# EAGLE board design (EAGLE 9.7.0)

Size 241.49 x 196.17 mm. Coordinates in mm from the lower left corner, seen from the top.
Outline: 0,0 241.49,0 241.49,196.17 0,196.17 0,0
Copper layers (1*16): Top 0.035mm / dielectric 1.5mm / Bottom 0.035mm
Design rules "default": minimum track width 6mil, minimum drill 0.35mm, track to track 6mil, track to pad 6mil, pad to pad 6mil, via to via 6mil, smd to smd 6mil, copper to edge 40mil, drill to drill 6mil, minimum pad ring 10mil, minimum via ring 8mil, stop-mask expansion 4mil, vias tented up to drill 0mil, thermal gap 10mil

## Footprints (pad centres in the part's own frame; a part is rotated, then mirrored left to right if it is on the bottom)
LEDRD254W60D565H860B = drill 0.981 pad 1.581: 1 -1.27,0; 2 1.27,0
LEDRD254W60D565H860B_Y = drill 0.981 pad 1.581: 1 -1.27,0; 2 1.27,0
MQ-XX-SOCKET = drill 1.27: 1 -6.223,6.223; 2 -8.788,0; 3 -6.223,-6.223; 4 6.223,-6.223; 5 8.788,0; 6 6.223,6.223
MOTOR = drill 1.118 pad 3.15 octagon: + 2.54,0; - -2.54,0
PIEZO = drill 1 pad 1.6: 1 -3.5,0; 2 3.5,0
28015 = drill 1.016 long: 1 -2.54,0; 2 0,0; 3 2.54,0
RESAD1016W63L850D250B = drill 0.83 pad 1.43: 1 -5.08,0; 2 5.08,0
GL5528 = drill 0.8 pad 1.4: 1 -1.702,0; 2 1.702,0
HA-06-SM065 = drill 1 pad 1.676: 1 -2.54,-2.54; 2 0,2.54; 3 2.54,-2.54
ARDUINO-UNO-R3-SHIELD = drill 1.016 pad 1.88: 3.3V 24.13,-2.54; 5V 24.13,0; A0 24.13,12.7; A1 24.13,15.24; A2 24.13,17.78; A3 24.13,20.32; A4 24.13,22.86; A5 24.13,25.4; AREF -24.13,-13.97; D2 -24.13,20.32; D3 -24.13,17.78; D4 -24.13,15.24; D5 -24.13,12.7; D6 -24.13,10.16; D7 -24.13,7.62; D8 -24.13,3.81; D9 -24.13,1.27; D10 -24.13,-1.27; D11 -24.13,-3.81; D12 -24.13,-6.35; D13 -24.13,-8.89; GND@0 24.13,2.54; GND@1 24.13,5.08; GND@2 -24.13,-11.43; IOREF 24.13,-7.62; NC 24.13,-10.16; RES 24.13,-5.08; RX -24.13,25.4; SCL -24.13,-19.05; SDA -24.13,-16.51; TX -24.13,22.86; VIN 24.13,7.62
JHD-162A = drill 1.016 long: 1 -19.05,0; 2 -16.51,0; 3 -13.97,0; 4 -11.43,0; 5 -8.89,0; 6 -6.35,0; 7 -3.81,0; 8 -1.27,0; 9 1.27,0; 10 3.81,0; 11 6.35,0; 12 8.89,0; 13 11.43,0; 14 13.97,0; 15 16.51,0; 16 19.05,0
TO92 = drill 0.813 octagon: 1 -1.27,0; 2 0,1.905; 3 1.27,0

## Placement (x,y rotation side)
D1  RED  [LEDRD254W60D565H860B]  7.91,139.59 270 top
D2  RED  [LEDRD254W60D565H860B]  7.91,132.55 270 top
D3  RED  [LEDRD254W60D565H860B]  7.91,38.54 270 top
D4  RED  [LEDRD254W60D565H860B]  7.91,31.5 270 top
D5  YELLOW  [LEDRD254W60D565H860B_Y]  233.58,138.57 90 top
D6  YELLOW  [LEDRD254W60D565H860B_Y]  233.58,133.49 90 top
D7  YELLOW  [LEDRD254W60D565H860B_Y]  233.58,128.41 90 top
D8  YELLOW  [LEDRD254W60D565H860B_Y]  232.88,34.99 90 top
D9  YELLOW  [LEDRD254W60D565H860B_Y]  232.88,40.07 90 top
D10  YELLOW  [LEDRD254W60D565H860B_Y]  232.88,29.91 90 top
D11  RED  [LEDRD254W60D565H860B]  187.92,58.13 180 top
GAS1  GAS-SENSORMQ-XX-SOCKET  [MQ-XX-SOCKET]  221.32,168.95 270 top
M1  MOTOR_HDR  [MOTOR]  183.29,161.43 0 top
M2  MOTOR_HDR  [MOTOR]  51.26,160.15 0 top
M3  MOTOR_HDR  [MOTOR]  181.75,8.26 180 top
M4  MOTOR_HDR  [MOTOR]  50.87,8.48 180 top
M5  MOTOR_HDR  [MOTOR]  163.79,45.43 0 top
PIEZO1  PIEZO  [PIEZO]  136.35,112.23 0 top
PING1  DISTANCE-SENSOR-3PIN  [28015]  215.86,84.2 270 top
R1  1k  [RESAD1016W63L850D250B]  122.38,117.31 90 top
R2  PHOTOCELL_GL5528  [GL5528]  212.56,47.69 270 top
R3  1k  [RESAD1016W63L850D250B]  133.31,58.13 0 top
R5  1k  [RESAD1016W63L850D250B]  184.11,53.05 0 top
R6  1k  [RESAD1016W63L850D250B]  189.19,32.73 90 top
R7  1k  [RESAD1016W63L850D250B]  207.64,183.7 0 top
RPOT1  250k  [HA-06-SM065]  53.8,114.77 0 top
U1  ARDUINO-UNO-R3-SHIELD  [ARDUINO-UNO-R3-SHIELD]  68.93,49.55 270 top
U2  LCD-16X2JHD-162A  [JHD-162A]  106.24,188.63 0 top
U3  TMP36GT9Z_TO92  [TO92]  170.64,104.61 0 top

## Library data of the parts
D1-D4 D11 = Tinkercad; CATEGORY: Opto-Electronic; SUB-CATEGORY: LED; VALUE: LED_RED
D5-D10 = Tinkercad; CATEGORY: Opto-Electronic; SUB-CATEGORY: LED; VALUE: LED_YELLOW
GAS1 M1-M5 PIEZO1 PING1 R1-R3 R5-R7 RPOT1 U1-U3 = Tinkercad

## Nets
D2_A: D2.1 D3.1 R3.2
D11_A: D11.1 R5.2
U1_5V: GAS1.4 GAS1.5 GAS1.6 PING1.2 R1.1 R2.1 RPOT1.3 U1.5V U2.2 U3.3
U1_A0: R2.2 R6.2 U1.A0
U1_A1: U1.A1 U3.2
U1_A2: GAS1.1 GAS1.3 R7.2 U1.A2
U1_D2: U1.D2 U2.13
U1_D3: U1.D3 U2.12
U1_D4: U1.D4 U2.11
U1_D5: U1.D5 U2.6
U1_D6: U1.D6 U2.4
U1_D7: PIEZO1.1 U1.D7
U1_D8: M5.+ U1.D8
U1_D9: D1.1 D4.1 D5.1 D6.1 D7.1 D8.1 D9.1 D10.1 U1.D9
U1_D10: R5.1 U1.D10
U1_D11: R3.1 U1.D11
U1_D12: PING1.3 U1.D12
U1_D13: M1.+ M2.+ M3.+ M4.+ U1.D13
U1_GND: D1.2 D2.2 D3.2 D4.2 D5.2 D6.2 D7.2 D8.2 D9.2 D10.2 D11.2 GAS1.2 M1.- M2.- M3.- M4.- M5.- PIEZO1.2 PING1.1 R6.1 R7.1 RPOT1.1 U1.GND@0 U1.GND@1 U1.GND@2 U2.1 U2.5 U2.16 U3.1
U1_TX: U1.TX U2.14
U2_LED+: R1.2 U2.15
U2_VO: RPOT1.2 U2.3

## Tracks (layer width: path | path; a pad name or v marks a point on that pad's centre or on a via)
D2_A  (2 unrouted)
D11_A  (1 unrouted)
U1_5V  (9 unrouted)
U1_A0  (2 unrouted)
U1_A1  (1 unrouted)
U1_A2  (3 unrouted)
U1_D2  (1 unrouted)
U1_D3  (1 unrouted)
U1_D4  (1 unrouted)
U1_D5  (1 unrouted)
U1_D6  (1 unrouted)
U1_D7  (1 unrouted)
U1_D8  (1 unrouted)
U1_D9  (8 unrouted)
U1_D10  (1 unrouted)
U1_D11  (1 unrouted)
U1_D12  (1 unrouted)
U1_D13  (4 unrouted)
U1_GND  (28 unrouted)
U1_TX  (1 unrouted)
U2_LED+  (1 unrouted)
U2_VO  (1 unrouted)